# Altium PCB TLSR8258_Module.PcbDoc
Units mm, origin at the board's own origin, x right, y up, seen from the top; angles counter-clockwise.
Board outline 22 x 32 mm, 2 copper layers (Top Layer, Bottom Layer); 29 components, 32 nets, 127 pads, 110 vias.
Unrouted connection lines stored in the file: 22.
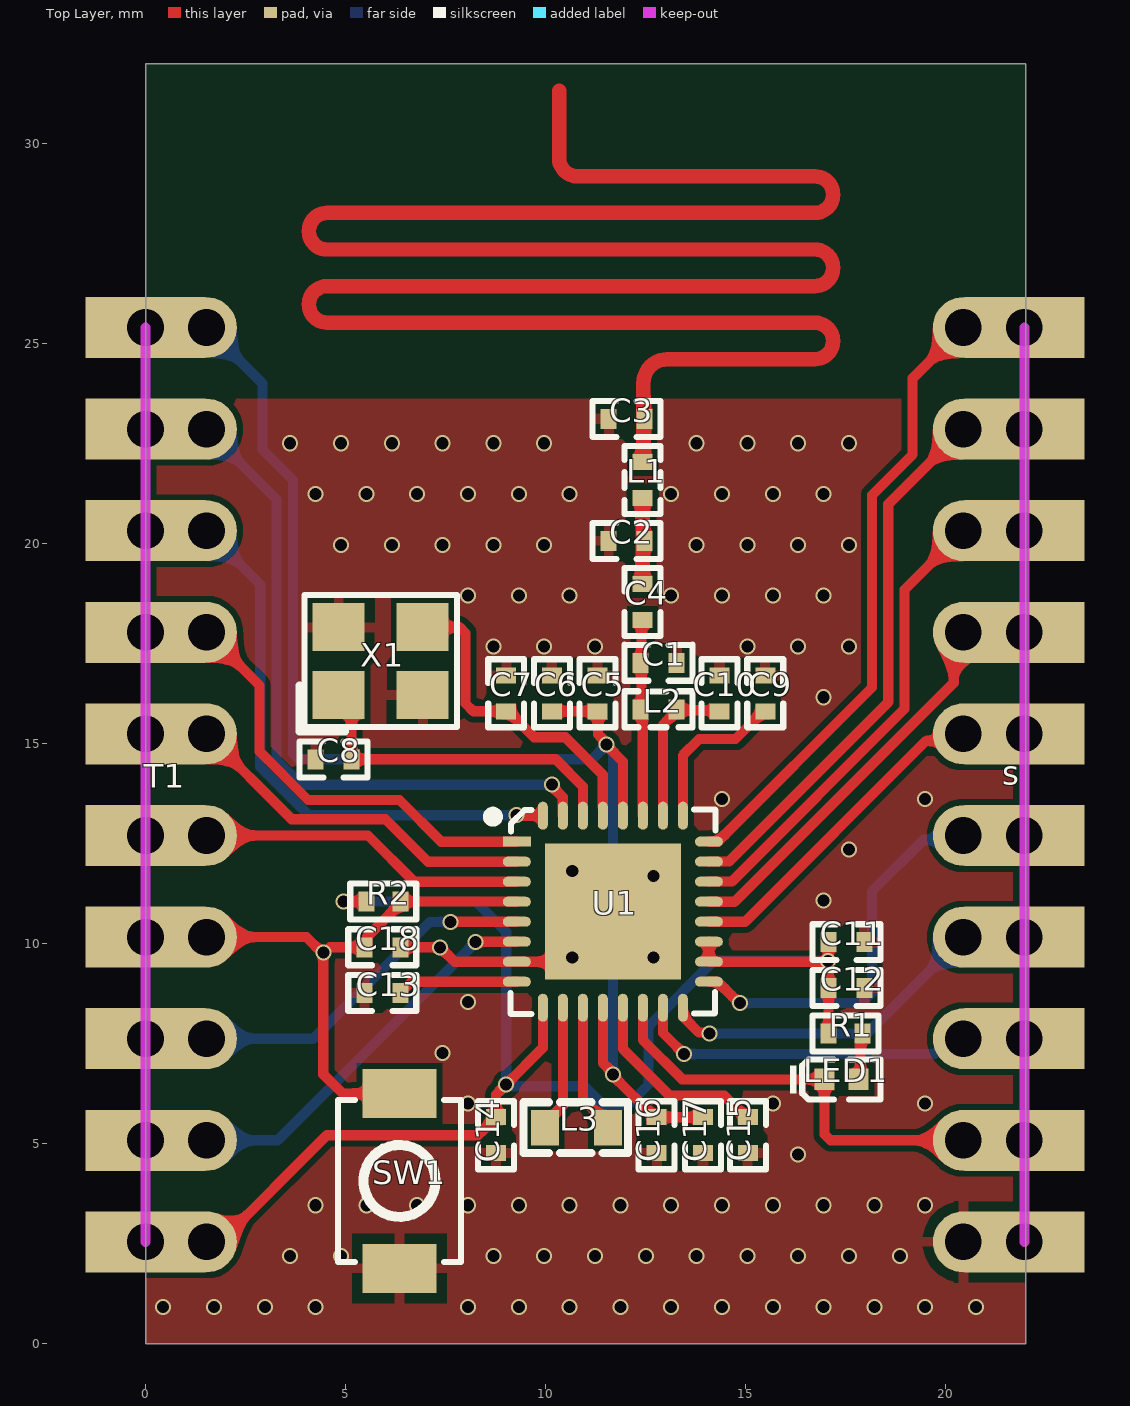
[diagram p0: Top Layer view]
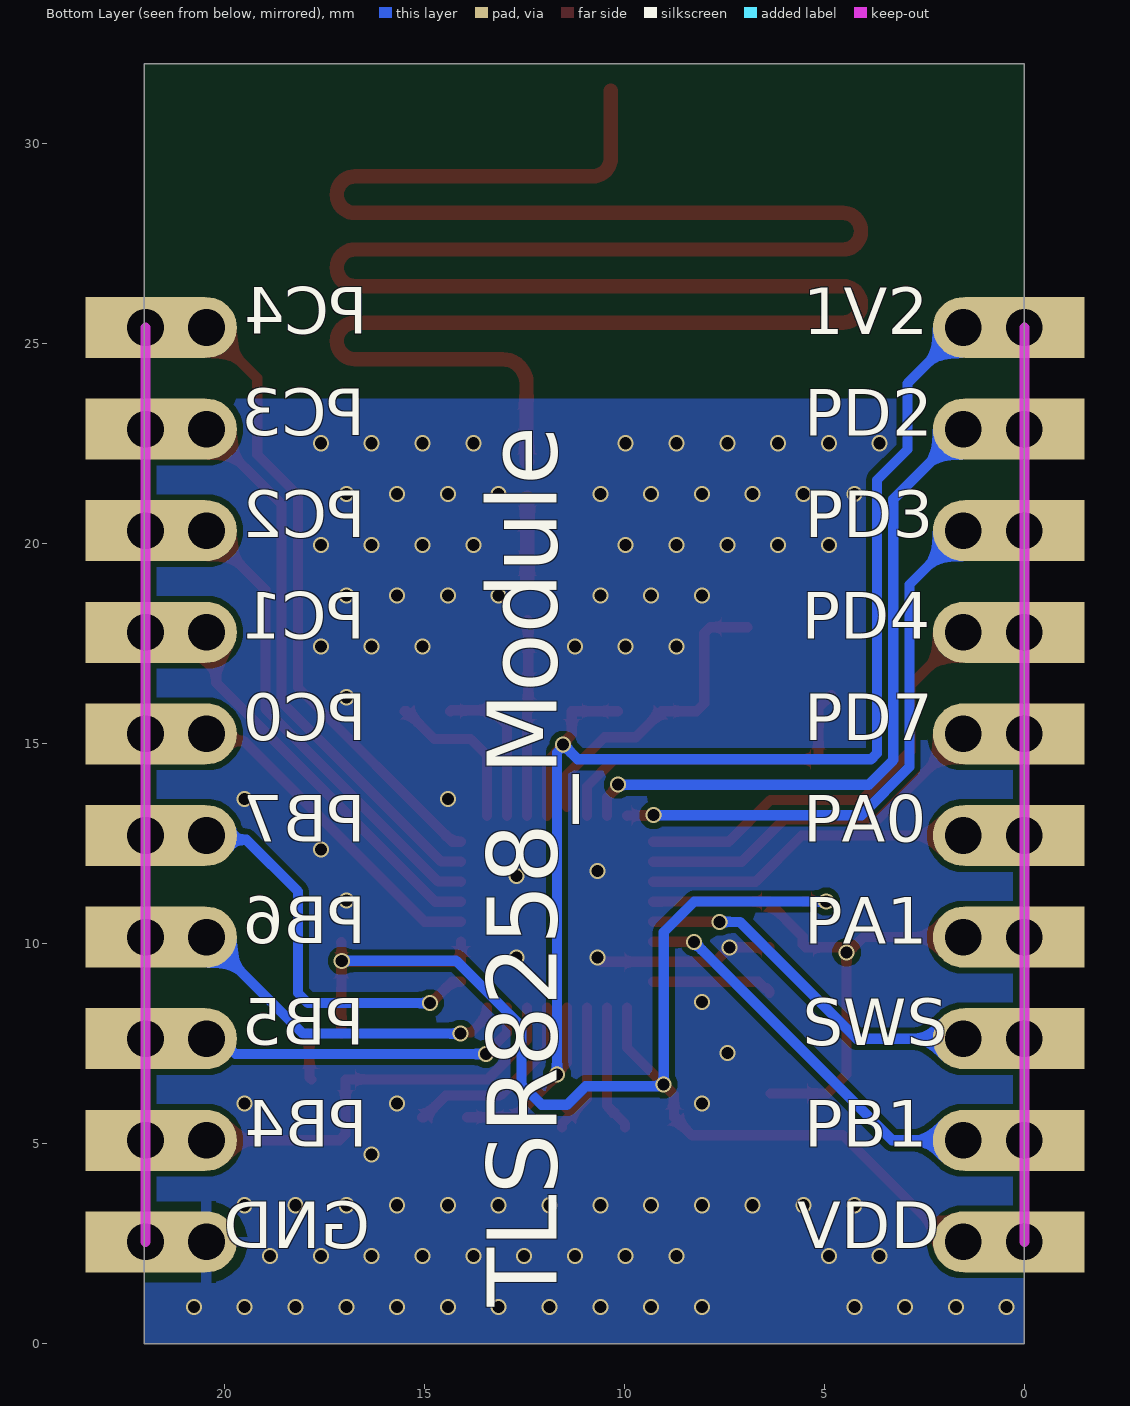
[diagram p1: Bottom Layer view, seen from below]
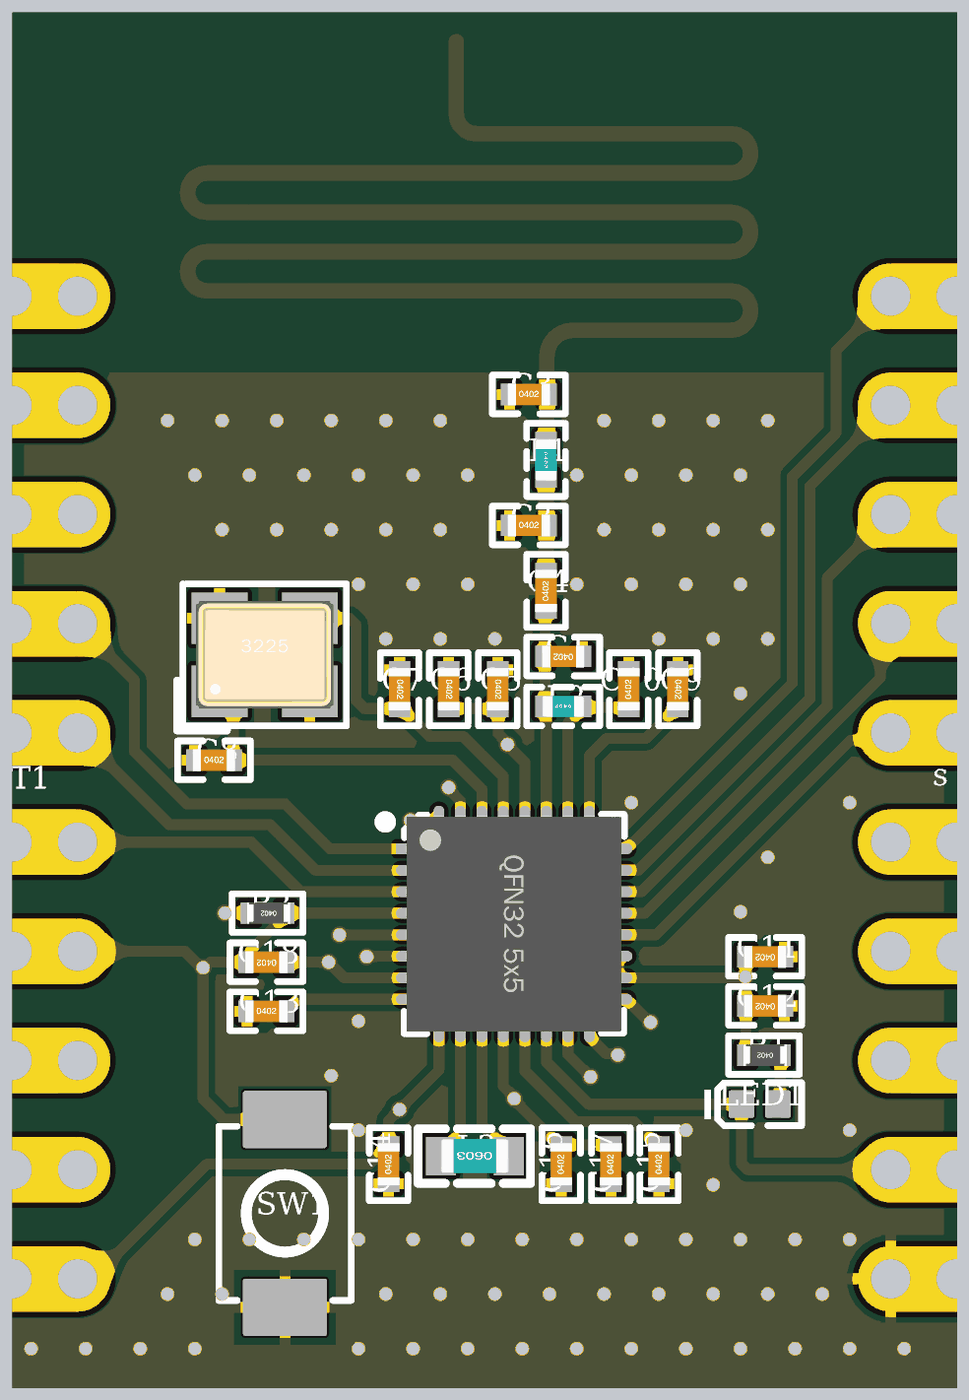
[diagram p2: 3D render of the assembled board from above, using the file's embedded part models]

## Layer stack, top to bottom
Top Solder: solder mask 0.0102, Solder Resist, Dk 3.5
Top Layer: signal copper 0.0356
Dielectric 1: dielectric 0.32, FR-4, Dk 4.8
Bottom Layer: signal copper 0.0356
Bottom Solder: solder mask 0.0102, Solder Resist, Dk 3.5

## Board outline
0,0 0,32 22,32 22,0

## Design rules (kind name [scope] priority, off if disabled: settings)
Clearance Clearance_1 [OnLayer('Multi-Layer') vs OnLayer('Keep-Out Layer')] p1: gap=0.152 ignorepadtopadclearanceinfootprint=FALSE except(0: Arc-THPad Arc-Hole Track-THPad Track-Hole)
Clearance [All] p2: gap=0.152 ignorepadtopadclearanceinfootprint=FALSE
MinimumSolderMaskSliver [All] p1: minsoldermaskwidth=0.025
NetAntennae [InNet('ANT_PCB')] p1: netantennaetolerance=910.217
PolygonConnect [All] p1: thpad.connectstyle=Relief thpad.reliefconductorwidth=0.254 thpad.reliefentries=4 thpad.polygonreliefangle="90 Angle" thpad.airgapwidth=0.254 smdpad.connectstyle=Relief smdpad.reliefconductorwidth=0.254 smdpad.reliefentries=4 smdpad.polygonreliefangle="90 Angle" smdpad.airgapwidth=0.254 via.connectstyle=Direct via.reliefconductorwidth=0.254 via.reliefentries=4 via.polygonreliefangle="90 Angle" via.airgapwidth=0.254
RoutingVias [All] p1: holewidth=0.301 width=0.401 viastyle="Through Hole" minholewidth=0.301 minwidth=0.401 maxholewidth=0.711 maxwidth=1.27
SilkToSilkClearance [All] p1: silktosilkclearance=0
SilkToSolderMaskClearance [IsPad] p1: minsilkscreentomaskgap=0 clearancetoexposedcopper=TRUE
SolderMaskExpansion [All] p1: expansion=0.102 istentingtop=FALSE
SupplyNets "Schematic Supply Nets_1" [InNet('TL_VDD_3V')] p1: voltage=0.000
SupplyNets "Schematic Supply Nets" [InNet('GND')] p2: voltage=0.000
Width [All] p1: maxlimit=0.508 minlimit=0.152 preferedwidth=0.152
26 further rules are at their usual default settings.

## Components (designator, comment, footprint, x,y, rotation, side; value= is the part's Value field where it differs from the comment)
C1 "2.7pF" "C 0402_L" 12.827,17.018 r180 top
C2 "2pF" "C 0402_L" 12.027,20.066 r0 top
C3 "0.5pF" "C 0402_L" 12.027,23.114 r0 top
C4 "220pF" "C 0402_L" 12.427,18.542 r90 top
C5 "2.2uF" "C 0402_L" 11.303,16.256 r270 top
C6 "100nF" "C 0402_L" 10.16,16.256 r270 top
C7 "NC" "C 0402_L" 9.017,16.256 r270 top
C8 "NC" "C 0402_L" 4.699,14.605 r0 top
C9 "1uF" "C 0402_L" 15.494,16.256 r270 top
C10 "18pF" "C 0402_L" 14.351,16.256 r90 top
C11 "100nF" "C 0402_L" 17.526,10.033 r180 top
C12 "1uF" "C 0402_L" 17.526,8.89 r180 top
C13 "1uF" "C 0402_L" 5.919,8.763 r0 top
C14 "1uF" "C 0402_L" 8.763,5.207 r90 top
C15 "1uF" "C 0402_L" 15.057,5.207 r90 top
C16 "100nF" "C 0402_L" 12.778,5.207 r90 top
C17 "1uF" "C 0402_L" 13.935,5.207 r90 top
C18 "100nF" "C 0402_L" 5.919,9.906 r180 top
L1 "3.3nH" "L 0402" 12.427,21.59 r270 top
L2 "1.3nH" "L 0402" 12.827,15.856 r180 top
L3 "6.8uH" "L 0603" 10.77,5.397 r180 top
LED1 "LED" LED0402-RD 17.399,6.604 r0 top
R1 "1K" "R 0402_L" 17.526,7.747 r180 top
R2 "10K" "R 0402_L" 5.969,11.049 r180 top
s "Semihole_1x6" SEMIHOLE_1x10 21.971,2.54 r270 top (schematic designator T2)
SW1 "TS-1088R-02026" SW-SMD_L3.9-W3.0-P4.45 6.35,4.064 r90 top
T1 "Semihole_1x6" SEMIHOLE_1x10 0,25.4 r90 top
U1 "TLSR8656F512ET32" "QFN32 5x5_L" 11.684,10.795 r270 top
X1 "TAXM24M4ZFBCCT2T" "OSC 3225-4P" 5.879,17.058 r0 top

## Footprints (in the part's own frame and the unit in brackets; to place one, negate y for a bottom-side part, rotate by r counter-clockwise, add the part's x,y. Pads: shape width x height; smd on the part's side, far side on the other; paste and mask are expansions set on the pad)
"C 0402_L" [mm] "无极性贴片电容         淘宝ID:黄晶宝石"
  rect 0.4x0.5 smd: 1(-0.45,0) 2(0.45,0)
  silkscreen extent -0.85,-0.45 0.85,0.45, body extent -0.5,-0.26 0.5,0.26, height 0.53
"L 0402" [mm] "小功率贴片电感"
  rect 0.4x0.5 smd: 1(-0.45,0) 2(0.45,0)
  silkscreen extent -0.85,-0.45 0.85,0.45, body extent -0.5,-0.25 0.5,0.25, height 0.5
"L 0603" [mil] "小功率贴片电感"
  rect 27.56x35 smd: 1(-31,0) 2(31,0)
  silkscreen extent -51,-25 52,25, body extent -31,-16 31,16, height 31
LED0402-RD [mm]
  rect 0.5x0.54 smd paste+0.051: 1(-0.425,0) 2(0.425,0)
  silkscreen extent -1.28,-0.5 0.98,0.5
"OSC 3225-4P" [mm] "3.2*2.5*0.7mm(长宽高)                         淘宝ID:黄晶宝石"
  rect 1.3x1.2 smd: 1(-1.05,-0.85) 2(1.05,-0.85) 3(1.05,0.85) 4(-1.05,0.85)
  silkscreen extent -2.03,-1.75 1.91,1.65, body extent -1.6,-1.25 1.6,1.25, height 0.7
"QFN32 5x5_L" [mm] "32脚，长：5mm，宽：5mm，高：9.5mm"
  rect 0.25x0.7 smd: 1(-1.751,-2.4)
  oval 0.25x0.7 smd: 2(-1.25,-2.4) 3(-0.75,-2.4) 4(-0.25,-2.4) 5(0.25,-2.4) 6(0.75,-2.4) 7(1.25,-2.4) 8(1.75,-2.4) 17(1.75,2.4) 18(1.25,2.4) 19(0.75,2.4) 20(0.25,2.4) 21(-0.25,2.4) 22(-0.75,2.4) 23(-1.25,2.4) 24(-1.75,2.4)
  oval 0.7x0.25 smd: 9(2.4,-1.75) 10(2.4,-1.25) 11(2.4,-0.75) 12(2.4,-0.25) 13(2.4,0.25) 14(2.4,0.75) 15(2.4,1.25) 16(2.4,1.75) 25(-2.4,1.75) 26(-2.4,1.25) 27(-2.4,0.75) 28(-2.4,0.25) 29(-2.4,-0.25) 30(-2.4,-0.75) 31(-2.4,-1.25) 32(-2.4,-1.75)
  rect 3.4x3.4 smd: 33(0,0)
  silkscreen extent -2.55,-3.12 2.55,2.57, body extent -2.5,-2.5 2.5,2.5, height 0.93
"R 0402_L" [mm] "1/16W贴片电阻     淘宝ID:黄晶宝石"
  rect 0.4x0.5 smd: 1(-0.4,0) 2(0.45,0)
  silkscreen extent -0.8,-0.45 0.85,0.45, body extent -0.5,-0.25 0.5,0.25, height 0.3
SEMIHOLE_1x10 [mil] "半孔，10脚"
  rect 60x118.11 hole 36 paste-99999 mask+5: 1(0,0) 2(-100,0) 3(-200,0) 4(-300,0) 5(-400,0) 6(-500,0) 7(-600,0) 8(-700,0) 9(-800,0) 10(-900,0)
  round 60 hole 36 paste-99999 mask+5: 1(0,-60) 2(-100,-60) 3(-200,-60) 4(-300,-60) 5(-400,-60) 6(-500,-60) 7(-600,-60) 8(-700,-60) 9(-800,-60) 10(-900,-60)
  Keep-Out Layer lines w10: 0,0 -900,0
SW-SMD_L3.9-W3.0-P4.45 [mm]
  rect 1.23x1.86 smd paste+0.051: 1(-2.185,0) 2(2.185,0)
  silkscreen extent -2.03,-1.54 2.03,1.54

## Part data
C1 C2 C3 C4 C5 C6 C7 C8 C9 C10 C11 C12 C13 C14 C15 C16 C17 C18: library part C, "贴片电容"
L1 L2 L3: library part L, "小功率贴片电感"
R1 R2: library part R, "贴片电阻"
s T1: library part Semihole_1x10
SW1: "电路结构:单刀单掷;按钮形状:圆形按钮;作用力:2.6N;安装方式:立贴;开关长度:3.9mm;开关宽度:2.93mm;开关高度:2mm;带支架:不带支架;触点电流:50mA;额定电压:12V;带灯:-;工作寿命:10万次;", Actuator/Cap Color=黑色, Contact Current=50mA, JLCPCB Part Class="Extended Part", LCSC Part Name="3.9*2.93*2mm 立贴 轻触开关", Manufacturer=XUNPU(讯普), Operating Force=2.6N, Voltage Rating=12V, Actuator Style=圆形按钮, AddInBom=yes, Circuit=单刀单掷, ConvertToPcb=yes, Datasheet=https://item.szlcsc.com/datasheet/TS-1088R-02026/457635.html, Device=TS-1088R-02026, FootprintName=SW-SMD_L3.9-W3.0-P4.45, Length=3.9mm, Life=10万次, ManufacturerPart=TS-1088R-02026, ModelId=b26698b69f274ffabef8a26c7d0e5dd1聨0819f05c4eef4c71ace90d822a990e87, ModelName=SW-SMD_L3.9-W2.9-H2.0-LS4.8, ModelTransform=188.976,114.174,0,0,0,0,0,0,0, Mounting Type=立贴, Supplier=LCSC, Supplier Footprint=SMD,4x3mm, SupplierPart=C455280, Switch Height=2mm, Symbol=TS-1088R-02026, Termination Style=SMD接片, Width=2.93mm, with Bracket=不带支架, With Lamp=-
X1: library part XTAL-4P, "4脚无源晶振(24M)"

## Via types
v1: diameter 0.401, hole 0.301, Top Layer to Bottom Layer, tented both sides, 110 vias

## Nets (pads, with @x,y where several pads share a name; then routed paths per layer and width w, separated by ;. In a path a pad name is that pad's centre, name@x,y a point inside that pad or via, vN(x,y) a via of type N, cw(c..) or ccw(c..) an arc to the next point about the centre after c; other vN are vias at no path point)
ANT_PCB: C3.2 L1.1 | length 70.9
  Top Layer w0.361: 10.338,31.318 10.338,29.636 ccw(c10.795,29.636) 10.795,29.179 16.733,29.179 cw(c16.733,28.722) 17.19,28.722 cw(c16.733,28.722) 16.733,28.265 4.541,28.265 ccw(c4.541,27.807) 4.084,27.807 ccw(c4.541,27.807) 4.541,27.35 16.733,27.35 cw(c16.733,26.893) 17.19,26.893 cw(c16.733,26.893) 16.733,26.436 4.541,26.436 ccw(c4.541,25.979) 4.084,25.979 ccw(c4.541,25.979) 4.541,25.521 16.733,25.521 cw(c16.733,25.064) 17.19,25.064 cw(c16.733,25.064) 16.733,24.607 13.05,24.607 ccw(c13.05,24.003) 12.446,24.003 12.446,22.059 cw(c12.427,22.059) L1.1
GND: C1.1 C2.1 C3.1 C5.1 C6.1 C7.1 C8.1 C9.1 C10.2 C11.1 C12.1 C13.1 C14.1 C15.1 C16.1 C17.1 C18.1 s.1 SW1.1 U1.7 U1.33 X1.2 X1.4 | length 4.5
  Top Layer w0.254: C18.1 v1(7.366,9.906) 7.727,9.545 U1.7 10.561,9.545 ccw(c10.561,9.652) v1(10.668,9.652)
  other v1: 0.442,0.917 1.712,0.917 2.982,0.917 4.252,0.917 8.062,0.917 9.332,0.917 10.602,0.917 11.872,0.917 13.142,0.917 14.412,0.917 15.682,0.917 16.952,0.917 18.222,0.917 19.492,0.917 20.762,0.917 3.617,2.187 4.887,2.187 8.697,2.187 9.967,2.187 11.237,2.187 12.507,2.187 13.777,2.187 15.047,2.187 16.317,2.187 17.587,2.187 18.857,2.187 4.252,3.457 5.522,3.457 6.792,3.457 8.062,3.457 9.332,3.457 10.602,3.457 11.872,3.457 13.142,3.457 14.412,3.457 15.682,3.457 16.952,3.457 18.222,3.457 19.492,3.457 16.317,4.727 8.062,5.997 15.682,5.997 19.492,5.997 7.427,7.267 8.062,8.537 12.7,9.652 16.952,11.077 12.7,11.684 10.668,11.811 17.587,12.347 14.412,13.617 19.492,13.617 16.952,16.157 8.697,17.427 9.967,17.427 11.237,17.427 15.047,17.427 16.317,17.427 17.587,17.427 8.062,18.697 9.332,18.697 10.602,18.697 13.142,18.697 14.412,18.697 15.682,18.697 16.952,18.697 4.887,19.967 6.157,19.967 7.427,19.967 8.697,19.967 9.967,19.967 13.777,19.967 15.047,19.967 16.317,19.967 17.587,19.967 4.252,21.237 5.522,21.237 6.792,21.237 8.062,21.237 9.332,21.237 10.602,21.237 13.142,21.237 14.412,21.237 15.682,21.237 16.952,21.237 3.617,22.507 4.887,22.507 6.157,22.507 7.427,22.507 8.697,22.507 9.967,22.507 13.777,22.507 15.047,22.507 16.317,22.507 17.587,22.507
NetC1_2: C1.2 C4.1 L2.2 U1.27 | length 4.9
  Top Layer w0.254: C4.1 12.402,18.067 12.402,15.881 L2.2 12.432,15.801 12.432,13.197 U1.27
NetC2_2: C2.2 C4.2 L1.2 | length 2.1
  Top Layer w0.361: C4.2 L1.2
NetC9_2: C9.2 U1.25 | length 4
  Top Layer w0.254: U1.25 13.434,14.704 13.843,15.113 14.751,15.113 15.444,15.806 C9.2
NetC10_1: C10.1 L2.1 U1.26 | length 3.9
  Top Layer w0.254: U1.26 12.934,15.463 13.277,15.806 L2.1 13.302,15.831 14.326,15.831 C10.1
NetC13_2: C13.2 U1.8 | length 3.1
  Top Layer w0.254: C13.2 6.369,8.813 6.442,8.886 6.492,8.886 6.651,9.045 U1.8
NetC15_2: C15.2 U1.13 | length 4.9
  Top Layer w0.254: U1.13 11.934,7.37 13.106,6.198 14.467,6.198 15.007,5.657 C15.2
NetL3_1: L3.1 U1.11 | length 3.3
  Top Layer w0.254: U1.11 10.934,6.114 11.557,5.491 L3.1
NetL3_2: L3.2 U1.10 | length 3.2
  Top Layer w0.254: L3.2 9.982,5.491 10.434,5.943 U1.10
NetLED1_2: LED1.2 R1.1 | length 1.2
  Top Layer w0.254: LED1.2 17.875,6.655 17.875,7.696 R1.1
TL_PA0: T1.6 U1.3 | length 8.2
  Top Layer w0.254: T1.6@1.524,12.7 5.563,12.7 6.718,11.545 U1.3
TL_PA1: C18.2 R2.1 SW1.2 T1.7 U1.4 | length 13.7
  Top Layer w0.254: T1.7@1.524,10.16 4.024,10.16 4.405,9.779 v1(4.445,9.779) ; SW1.2 4.927,6.249 4.445,6.731 v1(4.445,9.779) ; U1.4 9.063,11.045 9.059,11.049 R2.1 6.369,10.999 5.542,10.172 5.542,9.979 C18.2 4.612,9.906 4.485,9.779 v1(4.445,9.779)
TL_PB1: T1.9 U1.6 | length 9.8
  Top Layer w0.254: v1(8.255,10.033) 8.265,10.043 9.282,10.043 U1.6
  Bottom Layer w0.254: T1.9@1.524,5.08 3.302,5.08 v1(8.255,10.033)
TL_PB4: LED1.1 s.2 U1.14 | length 10.6
  Top Layer w0.254: U1.14 12.434,7.588 13.418,6.604 LED1.1 ; LED1.1@16.974,6.584 16.974,5.229 17.123,5.08 s.2@20.447,5.08
TL_PB5: s.3 U1.15 | length 8.5
  Top Layer w0.254: U1.15 12.936,8.393 12.936,7.765 v1(13.462,7.239)
  Bottom Layer w0.254: v1(13.462,7.239) 19.722,7.239 20.103,7.62 s.3@20.447,7.62
TL_PB6: s.4 U1.16 | length 8.4
  Top Layer w0.254: U1.16 13.434,8.174 13.833,7.775 14.069,7.775 v1(14.097,7.747)
  Bottom Layer w0.254: v1(14.097,7.747) 18.034,7.747 s.4@20.447,10.16
TL_PB7: s.5 U1.17 | length 9.8
  Top Layer w0.254: U1.17 14.305,9.045 14.841,8.509 v1(14.859,8.509)
  Bottom Layer w0.254: v1(14.859,8.509) 17.907,8.509 18.161,8.763 18.161,11.303 19.453,12.595 20.342,12.595 s.5@20.447,12.7
TL_PC0: s.6 U1.20 | length 8.3
  Top Layer w0.254: U1.20 14.99,10.545 19.512,15.067 20.274,15.067 s.6@20.447,15.24
TL_PC1: s.7 U1.21 | length 9.7
  Top Layer w0.254: U1.21 14.728,11.045 20.204,16.521 20.204,17.537 s.7@20.447,17.78
TL_PC2: s.8 U1.22 | length 11.7
  Top Layer w0.254: U1.22 14.086,11.547 14.655,11.547 18.974,15.866 18.974,18.847 s.8@20.447,20.32
TL_PC3: s.9 U1.23 | length 13.7
  Top Layer w0.254: U1.23 14.086,12.047 14.581,12.047 18.567,16.034 18.567,20.98 s.9@20.447,22.86
TL_PC4: s.10 U1.24 | length 15.6
  Top Layer w0.254: U1.24 14.305,12.545 18.161,16.401 18.161,21.209 19.177,22.225 19.177,24.13 s.10@20.447,25.4
TL_PD2: T1.2 U1.31 | length 17
  Top Layer w0.254: v1(10.16,13.97) 10.16,13.93 10.432,13.659 10.432,13.197 U1.31
  Bottom Layer w0.254: T1.2@1.524,22.86 3.277,21.107 3.277,14.585 3.892,13.97 v1(10.16,13.97)
TL_PD3: T1.3 U1.32 | length 14
  Top Layer w0.254: v1(9.271,13.208) 9.277,13.202 9.932,13.202 9.934,13.2 U1.32
  Bottom Layer w0.254: T1.3@1.524,20.32 2.87,18.974 2.87,14.417 4.079,13.208 v1(9.271,13.208)
TL_PD4: T1.4 U1.1 | length 10.9
  Top Layer w0.254: T1.4@1.524,17.78 2.85,16.454 2.85,14.803 4.064,13.589 6.35,13.589 7.393,12.546 U1.1
TL_PD7: T1.5 U1.2 | length 9.1
  Top Layer w0.254: T1.5@1.524,15.24 3.658,13.106 6.001,13.106 7.063,12.045 U1.2
TL_SWS: T1.8 U1.5 | length 9
  Top Layer w0.254: v1(7.62,10.541) 7.622,10.543 9.282,10.543 U1.5
  Bottom Layer w0.254: T1.8@1.524,7.62 4.191,7.62 7.112,10.541 v1(7.62,10.541)
TL_VDD_1V2: C5.2 C6.2 C16.2 C17.2 T1.1 U1.12 U1.28 | length 36.4
  Top Layer w0.254: C6.2 11.314,15.806 11.314,15.225 11.529,15.01 11.529,14.957 11.934,14.552 U1.28 ; U1.12 11.434,7.021 11.684,6.771 11.684,6.701 12.728,5.657 C17.2
  Bottom Layer w0.254: T1.1@1.524,25.4 2.921,24.003 2.921,22.352 3.683,21.59 3.683,14.754 3.832,14.605 11.164,14.605 v1(11.529,14.97) 11.529,14.93 11.684,14.776 v1(11.684,6.731)
TL_VDD_3V: C11.2 C12.2 C14.2 R1.2 R2.2 T1.10 U1.9 U1.18 U1.19 | length 36.9
  Top Layer w0.254: T1.10@1.524,2.54 1.868,2.54 4.535,5.207 8.313,5.207 8.64,5.534 8.64,5.584 8.713,5.657 C14.2 8.763,5.73 8.763,6.223 v1(9.017,6.477) 9.934,7.394 U1.9 ; v1(4.953,11.049) R2.2 ; U1.19@14.086,10.043 U1.19 U1.18 17.043,9.545 v1(17.065,9.567) ; R1.2 C12.2 17.071,8.895 17.071,9.562 v1(17.065,9.567) ; C11.2 17.071,10.028 17.071,9.573 v1(17.065,9.567)
  Bottom Layer w0.254: v1(4.953,11.049) 8.255,11.049 9.017,10.287 v1(9.017,6.477) 9.045,6.449 9.149,6.449 9.166,6.432 9.376,6.432 10.967,6.432 11.43,5.969 12.065,5.969 12.573,6.477 12.573,7.935 14.205,9.567 v1(17.065,9.567)
TL_XC1: C7.2 U1.29 X1.3 | length 7.9
  Top Layer w0.254: X1.3 7.852,17.908 8.001,17.759 8.001,16.002 8.197,15.806 9.067,15.806 9.716,15.157 10.497,15.157 11.432,14.222 U1.29@11.432,13.418
TL_XC2: C8.2 U1.30 X1.1 | length 8.5
  Top Layer w0.254: X1.1 5.149,15.888 C8.2 10.255,14.605 10.934,13.926 U1.30

## Polygon pours and split planes (outlines as drawn)
GND on Bottom Layer "GND_L02_P001" (solid, remove dead copper, pour order 1): 0,0 0,32 22,32 22,0
GND on Top Layer "GND_L01_P003" (solid, remove dead copper, pour order 3): 0,0 0,32 22,32 22,0

## Other copper
Multi-Layer:
  pour cut-out: 0,23.622 0,32 22,32 22,23.622

## Silkscreen, mask and mechanical layers (free items; w line width, h text height)
Bottom Overlay:
  text "1V2" at 5.524,24.847 h2
  text "PC4" at 16.41,24.855 h2
  text "PD2" at 5.508,22.307 h2
  text "PC3" at 16.484,22.315 h2
  text "PD3" at 5.487,19.775 h2
  text "PC2" at 16.463,19.774 h2
  text "PD4" at 5.561,17.236 h2
  text "PC1" at 16.472,17.235 h2
  text "PD7" at 5.502,14.696 h2
  text "PC0" at 16.439,14.695 h2
  text "PA0" at 5.532,12.155 h2
  text "PB7" at 16.469,12.156 h2
  text "PB6" at 16.45,9.623 h2
  text "PA1" at 5.499,9.613 h2
  text "PB5" at 16.491,7.083 h2
  text "SWS" at 5.537,7.075 h2
  text "PB1" at 5.499,4.533 h2
  text "PB4" at 16.41,4.536 h2
  text "VDD" at 5.673,1.996 h2
  text "GND" at 16.35,1.995 h2
  text "TLSR8258_Module" at 11.116,0.917 h3 r270
Mechanical 1:
  lines w0.254: 0,0 22,0 ; 0,0 0,32 ; 0,0 22,0 ; 0,0 0,32 ; 0,32 22,32 ; 0,32 22,32 ; 22,0 22,32 ; 22,0 22,32